# Altium PCB FRDM-Shield3.PcbDoc (part 1 of 2)
Units mil, origin at the board's own origin, x right, y up, seen from the top; angles counter-clockwise.
Board outline 3211.75 x 2684.86 mil, 2 copper layers (Top Layer, Bottom Layer), stack 15.3 mil thick; 43 components, 78 nets, 228 pads, 12 vias.
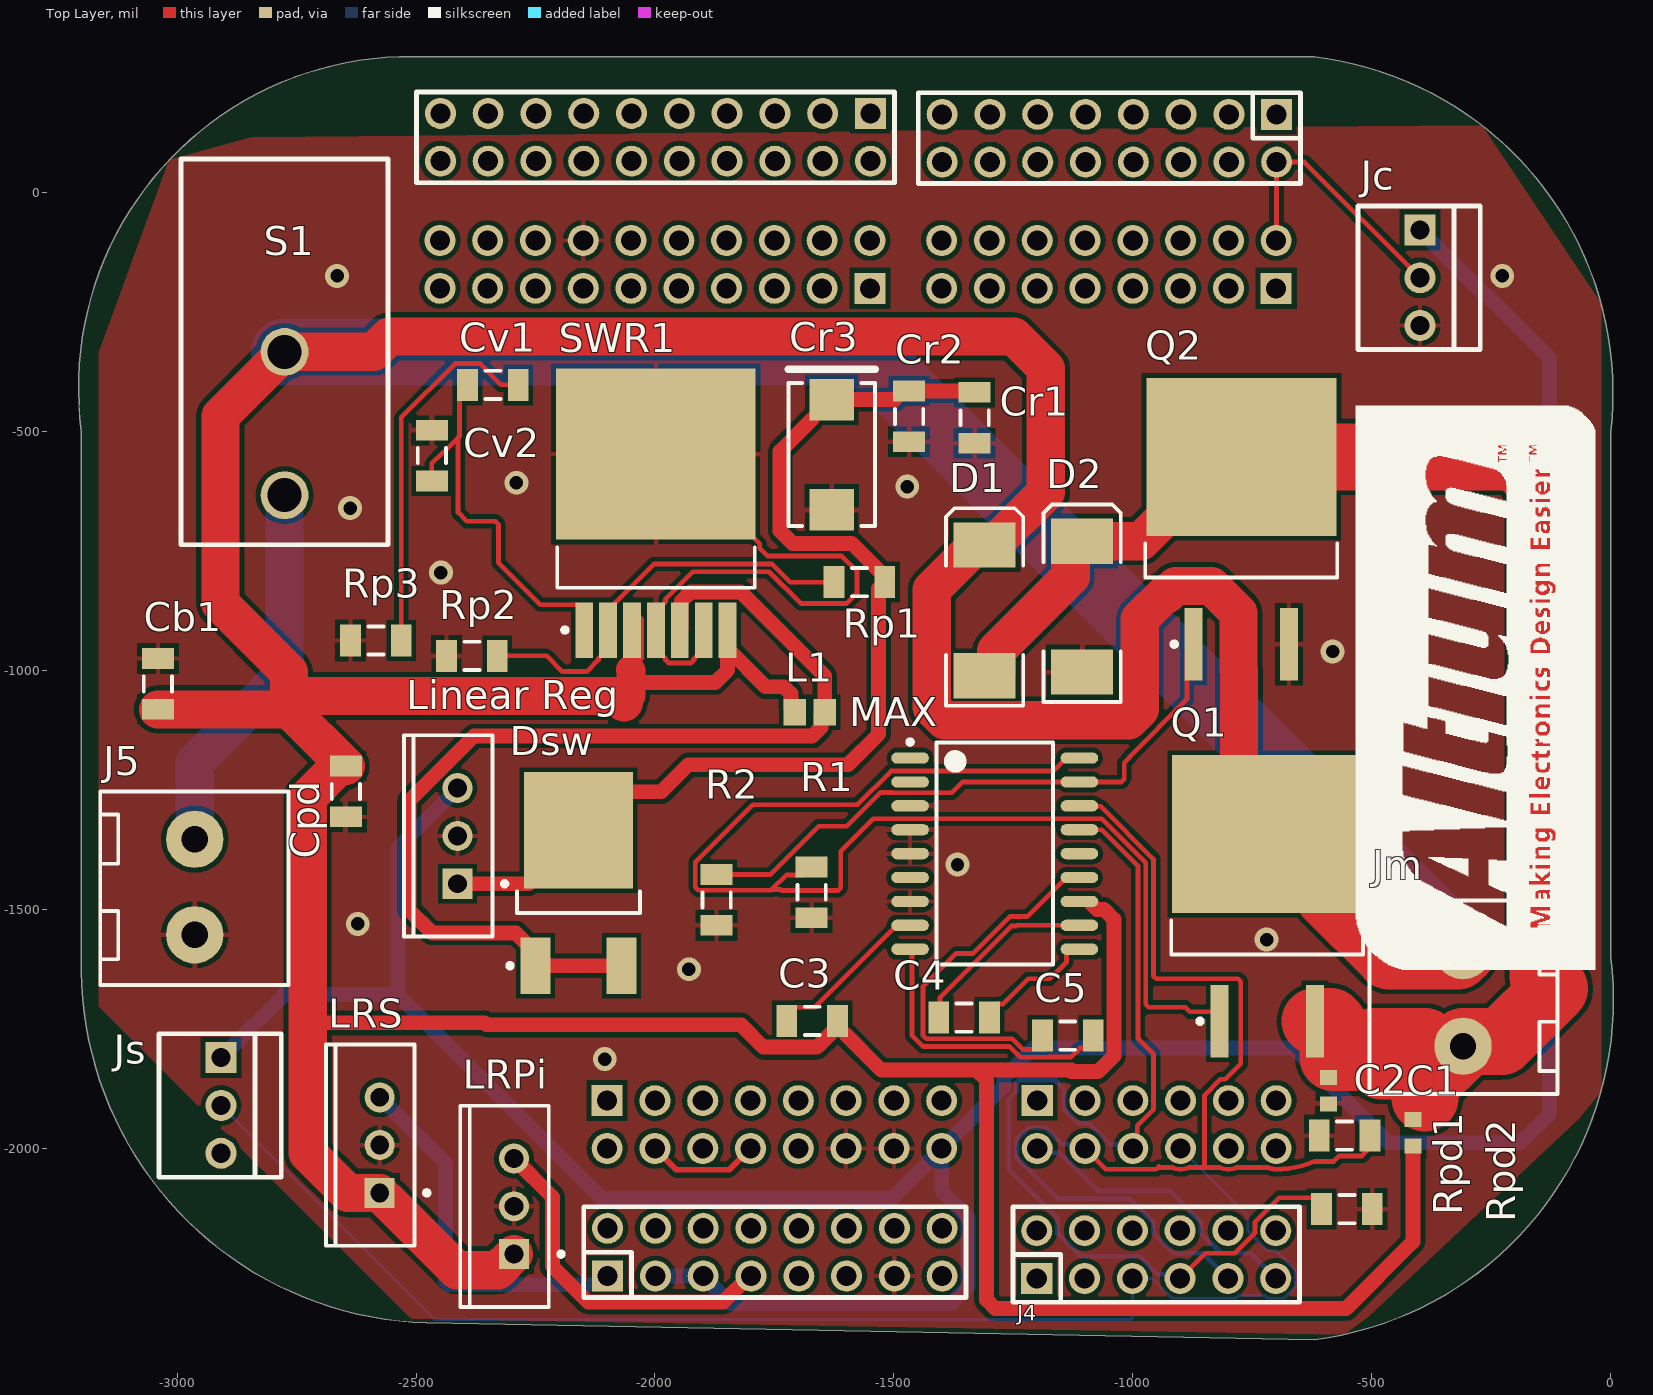
[diagram p0: Top Layer view]
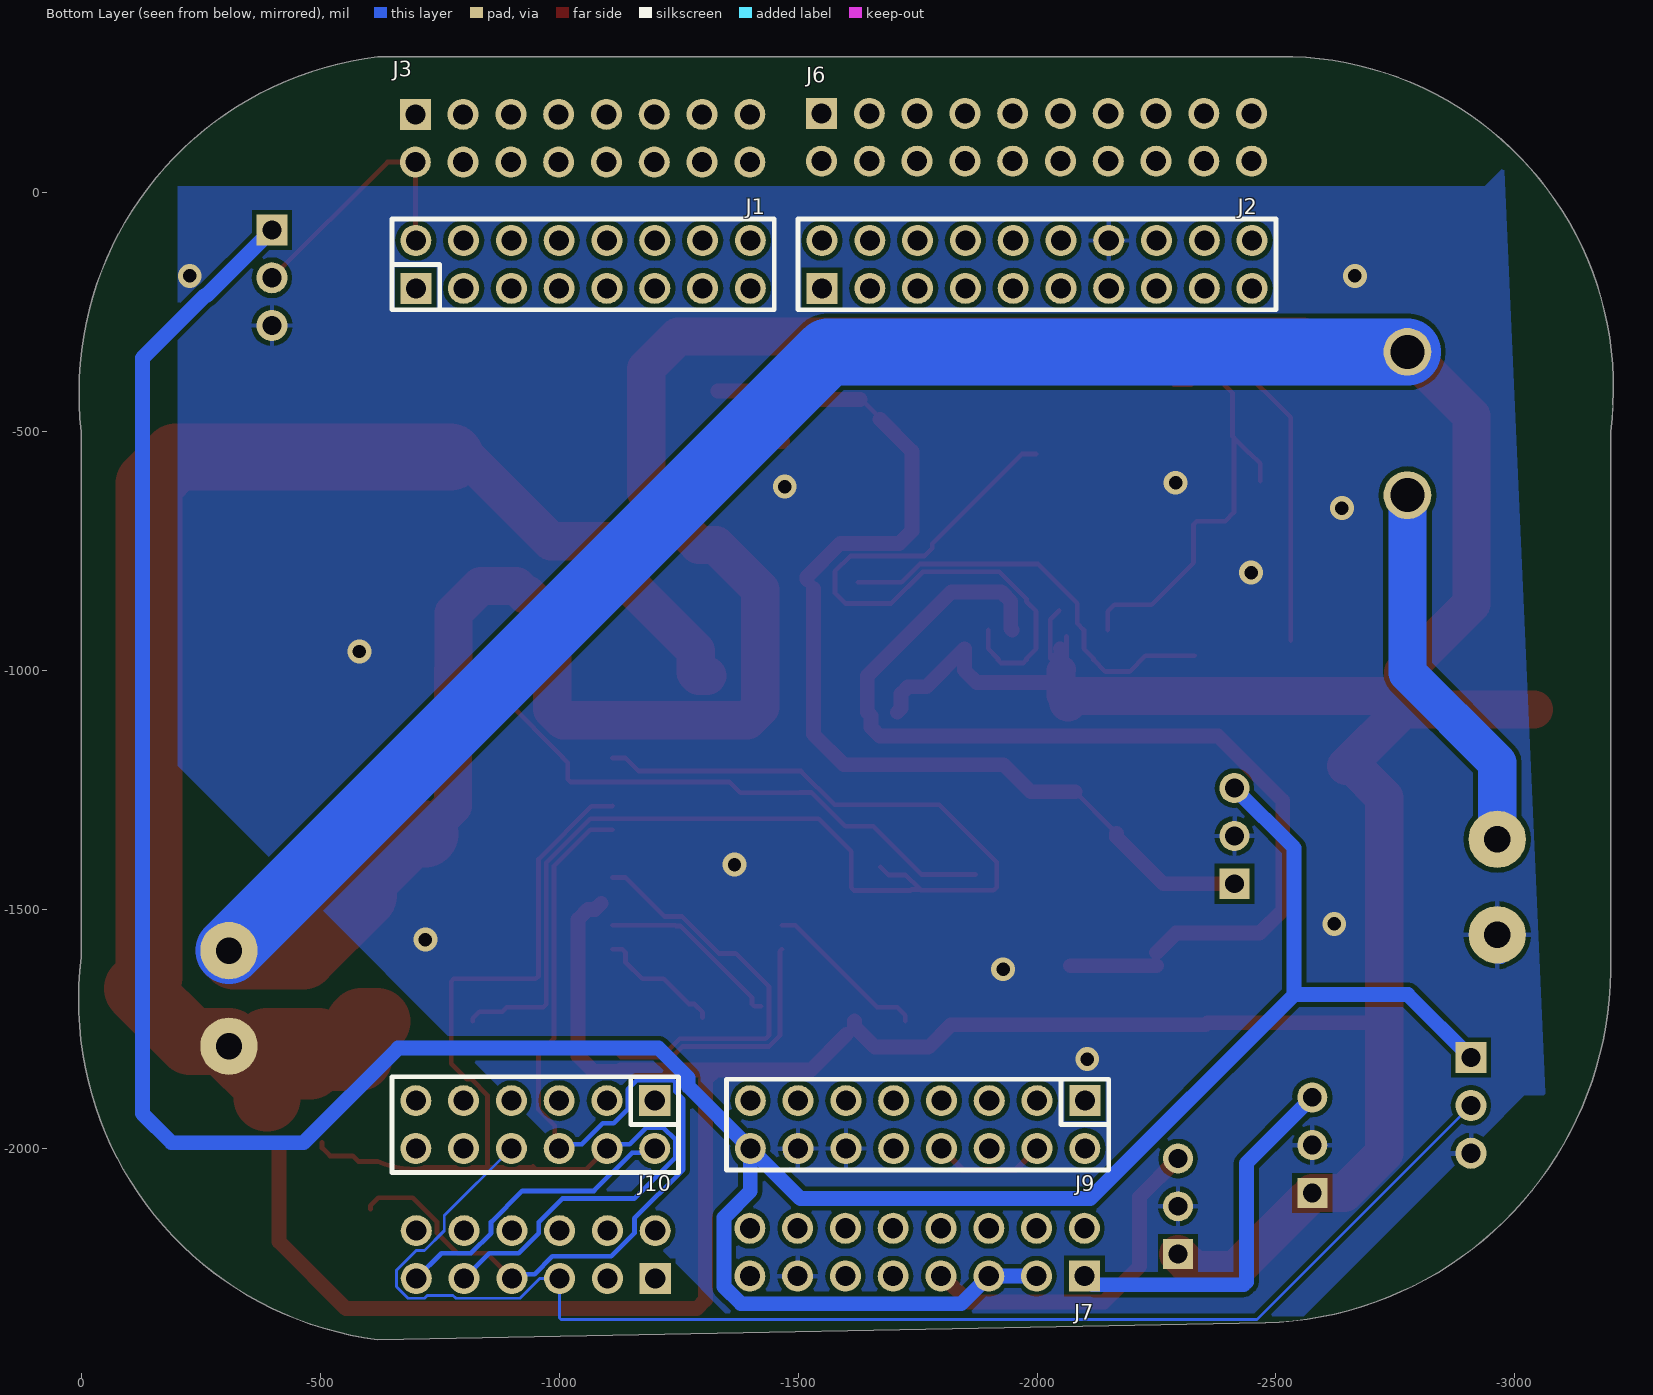
[diagram p1: Bottom Layer view, seen from below]
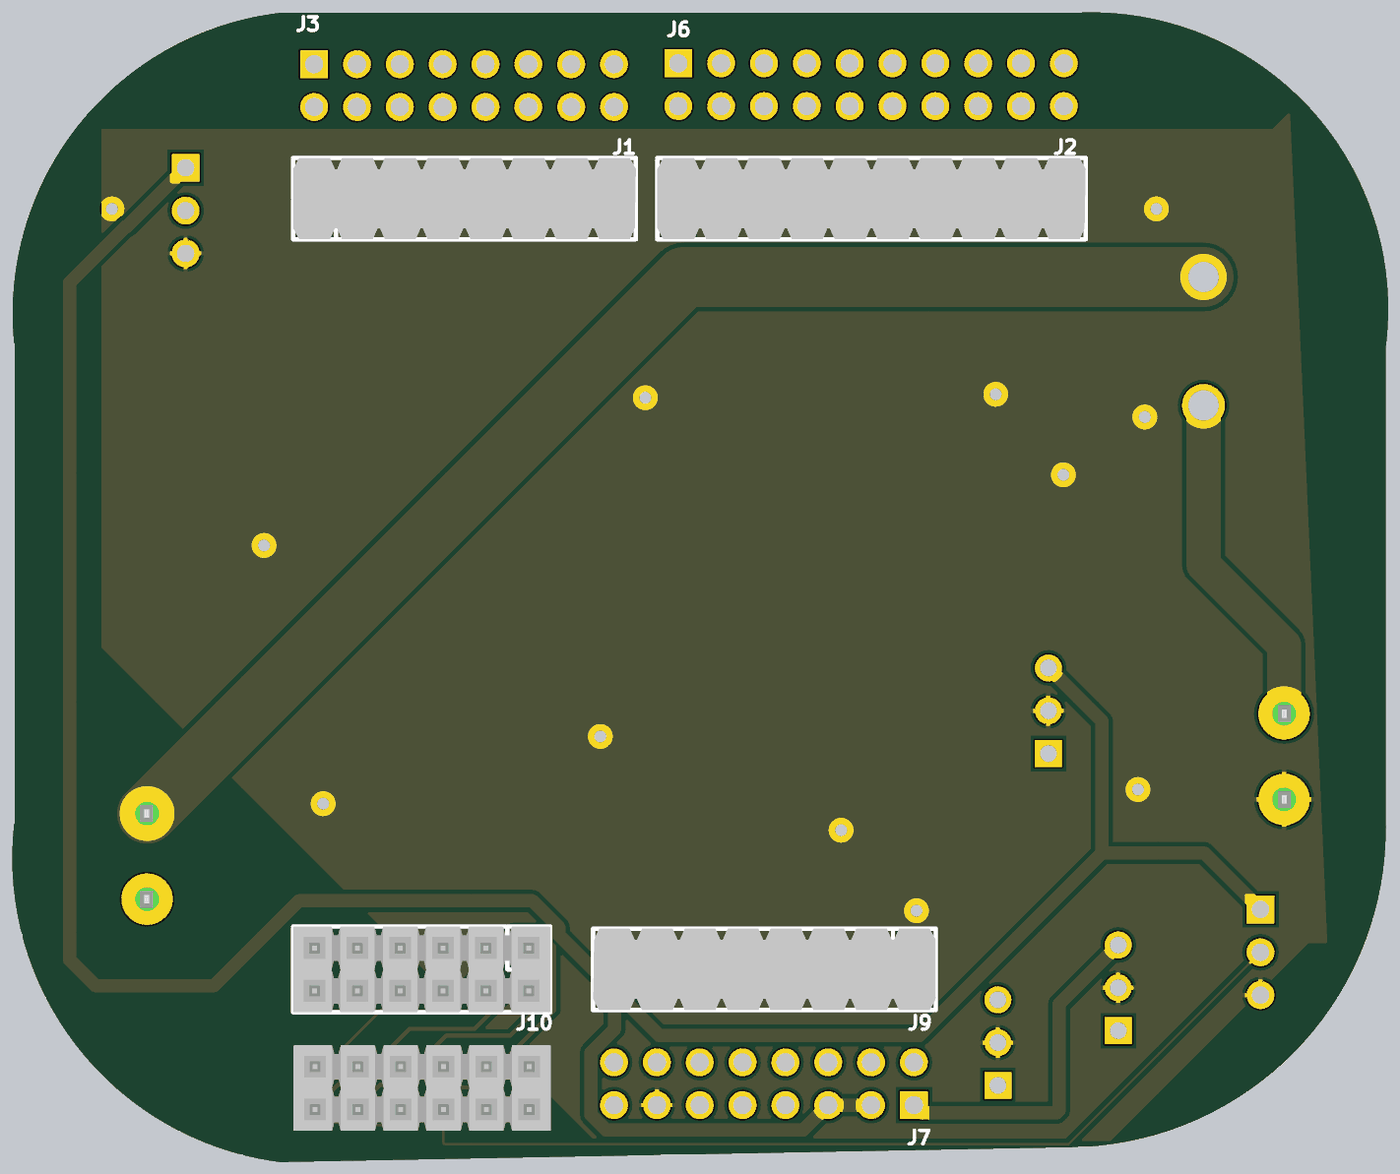
[diagram p2: 3D render of the assembled board from below, using the file's embedded part models]

## Layer stack, top to bottom
Top Solder: solder mask 0.4, Solder Resist, Dk 3.5
Top Layer: signal copper 1.4
Dielectric1: core 12.5, FR-4, Dk 4.8
Bottom Layer: signal copper 1.4
Bottom Solder: solder mask 0.4, Solder Resist, Dk 3.5

## Board outline
-3200,-1600 ccw(c-2456.51,-1621.51) -2478.02,-2365 -620.19,-2400 ccw(c-710.1,-1689.91) 0,-1600 0,-500 ccw(c-702.09,-418.09) -620.19,284 -989,284 -1736,284 -2478.02,284 ccw(c-2513.25,-407.99) -3200,-500

## Design rules (kind name [scope] priority, off if disabled: settings)
Clearance Polygon [(InNet('GND') AND InPoly)] p1: gap=10 ignorepadtopadclearanceinfootprint=FALSE except(0: Arc-Hole Track-Hole SMDPad-Hole THPad-Hole Via-Hole Fill-Hole Poly-Hole Region-Hole Text-Hole)
Clearance [All] p2: gap=6 ignorepadtopadclearanceinfootprint=FALSE
ComponentClearance [All] p1: gap=0 collisioncheckmode=3 verticalgap=0 showdistances=FALSE
Height [All] p1: minheight=0 maxheight=1500 prefheight=500
HoleSize [All] p1: absolutevalues=TRUE maxlimit=250 minlimit=15 maxpercent=80.000 minpercent=20.000
HoleToHoleClearance [All] p1: gap=2 allowstackedmicrovias=TRUE
MinimumAnnularRing [All] p1: minimumring=7
MinimumSolderMaskSliver [All] p1: minsoldermaskwidth=6
PlaneConnect [All] p1: planeconnectstyle=Direct reliefexpansion=20 reliefentries=4 reliefconductorwidth=10 reliefairgap=10
PolygonConnect PolygonConnect_1 [IsVia] p1: connectstyle=Direct reliefconductorwidth=10 reliefentries=4 polygonreliefangle="90 Angle" airgapwidth=10
PolygonConnect [All] p2: connectstyle=Relief reliefconductorwidth=10 reliefentries=4 polygonreliefangle="90 Angle" airgapwidth=10
RoutingVias [All] p1: holewidth=12 width=24 viastyle="Through Hole" minholewidth=12 minwidth=24 maxholewidth=50 maxwidth=100
ShortCircuit ShortCircuit_1 [HasFootprint('4-40 X 250') vs HasFootprint('4-40 X 250')] p1: allowed=TRUE
ShortCircuit [All] p2: allowed=FALSE
SilkToSilkClearance [All] p1: silktosilkclearance=0
SilkToSolderMaskClearance SilkscreenOverComponentPads [IsPad] p1: minsilkscreentomaskgap=0 clearancetoexposedcopper=TRUE
SolderMaskExpansion [All] p1: expansion=4 istentingtop=FALSE
Width [All] p1: maxlimit=300 minlimit=6 preferedwidth=6
21 further rules are at their usual default settings.

## Classes and differential pairs
component class PSU: Cb1 Cr1 Cr2 Cr3 Cv1 Cv2 Dsw L1 "Linear Reg" Rp1 Rp2 Rp3 SWR1
component class MotorController: C1 C2 C3 C4 C5 Cpd D1 D2 Jm MAX Q1 Q2 R1 R2 Rpd1 Rpd2
component class Connectors: D6 J1 J2 J3 J4 J5 J6 J7 J8 J9 J10 J12 Jc Js LRPi LRS R18 S1

## Components (designator, comment, footprint, x,y, rotation, side; value= is the part's Value field where it differs from the comment)
C1 "1608-1365-1-ND" 1608[0603] -414,-1967 r270 top value=100pF
C2 "1608-1365-1-ND" 1608[0603] -591,-1879 r90 top value=100pF
C3 "720-VJ0603V105ZXJCW1BCCT-ND" C1206 -1671,-1733 r0 top value=1uF
C4 "311-3320-1-ND" C1206 -1353,-1726 r0 top value=0.047uF
C5 "311-3320-1-ND" C1206 -1136,-1764 r0 top value=0.047uF
Cb1 "581-F931C226MAAAJ6" C1206 -3040,-1028 r270 top value=22uF
Cpd "587-6508-1-ND" C1206 -2647,-1253 r90 top value=0.1uF
Cr1 "581-F931C226MAAAJ6" C1206 -1331,-471 r90 top value=22uF
Cr2 "581-F931C226MAAAJ6" C1206 -1468,-468 r90 top value=22uF
Cr3 "399-3770-1-ND" KEMT-T491-D_L -1630,-548 r270 top
Cv1 "311-3320-1-ND" C1206 -2339,-402 r0 top value=0.047uF
Cv2 "311-3320-1-ND" C1206 -2467,-550 r90 top value=0.047uF
D1 "65W8781" SMC -1310,-874 r90 top
D2 "65W8781" SMC -1106,-866 r90 top
Dsw "MBRD835LT4G" ONSC-DPAK-3-369C-01_V -2160,-1444.24 r90 top
J1 "67996-416HLF" 67996-416HLF#1 -1050,-150 r180 bottom locked
J2 "67996-420HLF" 67996-420HLF#1 -2000,-150 r180 bottom locked
J3 "67996-416HLF" 67996-416HLF#2 -1050,116 r0 bottom
J4 "67996-412HLF" 67996-412HLF#1 -951,-2227 r180 top locked
J5 "282857-2" 282857-2 -2963,-1353 r180 top
J6 "67996-420HLF" 67996-420HLF#2 -1999,116 r0 bottom
J7 "67996-416HLF" 67996-416HLF#2 -1748,-2219 r180 bottom locked
J9 "67996-416HLF" 67996-416HLF#1 -1750,-1950 r0 bottom locked
J10 "67996-412HLF" 67996-412HLF#2 -950,-1950 r0 bottom locked
Jc "571-6404543" 6404543 -399,-178 r0 top
Jm "282857-2" 282857-2 -309,-1786 r0 top
Js "571-6404543" 6404543 -2908,-1910 r0 top
L1 "732-1025-1-ND" 2029 -1676,-1087 r0 top value=10uH
"Linear Reg" "LM2940CT-5.0/NOPB-ND" NDE0003A -2413,-1346 r90 top
LRPi "LM2940CT-5.0/NOPB-ND" NDE0003A -2295,-2121 r90 top
LRS "LM2940CT-5.0/NOPB-ND" NDE0003A -2576,-1993 r90 top
MAX "MAX620CWN+" SOIC-SO18_L -1289,-1383 r0 top
Q1 "726-IPB50R140CP" INF-PG-TO263-3-2_N -719,-1493.57 r90 top
Q2 "726-IPB50R140CP" INF-PG-TO263-3-2_N -773,-704.57 r90 top
R1 "311-10KGRCT-ND" C1206 -1672,-1464 r90 top value=10K
R2 "311-10KGRCT-ND" C1206 -1871,-1480 r90 top value=10K
Rp1 "541-53.6FCT-ND" C1206 -1572,-815 r0 top value=53.6K
Rp2 "CR1206-FX-6191ELFCT-ND" C1206 -2383,-969 r0 top value=6.19K
Rp3 "CR1206-FX-2001ELFCT-ND" C1206 -2584,-937 r0 top value=2K
Rpd1 "603-RT1206FRD0710KL" C1206 -557,-1973 r180 top value=1K
Rpd2 "603-RT1206FRD0710KL" C1206 -552,-2127 r180 top value=1K
S1 "SW-PB" SPST -2775,-333 r90 top
SWR1 "LT1370CR#TRPBFCT-ND" LT-R-7_L -1998,-671 r90 top

## Footprints (in the part's own frame and the unit in brackets; to place one, negate y for a bottom-side part, rotate by r counter-clockwise, add the part's x,y. Pads: shape width x height; smd on the part's side, far side on the other; paste and mask are expansions set on the pad)
1608[0603] [mm] "Chip Capacitor, Body 1.6x0.8mm, IPC High Density"
  rect 0.8x0.9 smd: 1(-0.7,0) 2(0.7,0)
  body extent -0.87,-0.48 0.87,0.48, height 1.3
2029 [mm] "Chip Inductor, Body 2.0x1.2mm, IPC High Density"
  rect 1.2x1.4 smd: 1(-0.8,0) 2(0.8,0)
  body extent -1.1,-0.7 1.1,0.7, height 0.55
67996-412HLF#1 [mil] "CONN HEADER 12POS .100 STR TIN"
  rect 65x65 hole 42: 1(250,45)
  round 65 hole 42: 2(250,-55) 3(150,45) 4(150,-55) 5(50,45) 6(50,-55) 7(-50,45) 8(-50,-55) 9(-150,45) 10(-150,-55) 11(-250,45) 12(-250,-55)
  silkscreen extent -300,-105 300,95, body extent -300,-100 300,100, height 80
67996-412HLF#2 [mil] "CONN HEADER 12POS .100 STR TIN"
  rect 65x65 hole 42: 1(-250,-50)
  round 65 hole 42: 2(-250,50) 3(-150,-50) 4(-150,50) 5(-50,-50) 6(-50,50) 7(50,-50) 8(50,50) 9(150,-50) 10(150,50) 11(250,-50) 12(250,50)
  silkscreen extent -300,-100 300,100, body extent -300,-100 300,100, height 331
67996-416HLF#1 [mil] "CONN HEADER 16POS .100 STR TIN"
  rect 65x65 hole 42: 1(-350,-50)
  round 65 hole 42: 2(-350,50) 3(-250,-50) 4(-250,50) 5(-150,-50) 6(-150,50) 7(-50,-50) 8(-50,50) 9(50,-50) 10(50,50) 11(150,-50) 12(150,50) 13(250,-50) 14(250,50) 15(350,-50) 16(350,50)
  silkscreen extent -400,-95 400,95, body extent -400,-95 400,95, height 305
67996-416HLF#2 [mil] "CONN HEADER 16POS .100 STR TIN"
  rect 65x65 hole 42: 1(351,-48)
  round 65 hole 42: 2(351,52) 3(251,-48) 4(251,52) 5(151,-48) 6(151,52) 7(51,-48) 8(51,52) 9(-49,-48) 10(-49,52) 11(-149,-48) 12(-149,52) 13(-249,-48) 14(-249,52) 15(-349,-48) 16(-349,52)
  body extent -399,-93 401,97, height 305
67996-420HLF#1 [mil] "CONN HEADER 20POS .100 STR TIN"
  rect 65x65 hole 42: 1(-450,-50)
  round 65 hole 42: 2(-450,50) 3(-350,-50) 4(-350,50) 5(-250,-50) 6(-250,50) 7(-150,-50) 8(-150,50) 9(-50,-50) 10(-50,50) 11(50,-50) 12(50,50) 13(150,-50) 14(150,50) 15(250,-50) 16(250,50) 17(350,-50) 18(350,50) 19(450,-50) 20(450,50)
  silkscreen extent -500,-95 500,95, body extent -500,-95 500,95, height 305
67996-420HLF#2 [mil] "CONN 20 PIN 0.100 IN"
  rect 65x65 hole 42: 1(450,-50)
  round 65 hole 42: 2(450,50) 3(350,-50) 4(350,50) 5(250,-50) 6(250,50) 7(150,-50) 8(150,50) 9(50,-50) 10(50,50) 11(-50,-50) 12(-50,50) 13(-150,-50) 14(-150,50) 15(-250,-50) 16(-250,50) 17(-350,-50) 18(-350,50) 19(-450,-50) 20(-450,50)
  body extent -500,-95 500,95, height 305
282857-2 [mil] "TE CONNECTIVITY / BUCHANAN  282857-2  Wire-To-Board Terminal Block, 2, 300 V, 24 A, 30 AWG, 12 AWG, 3 mm²"
  round 120 hole 55: 1(0,0) 2(0,200)
  silkscreen extent -196,-100 198,305, body extent -196,-100 198,320, height 752
6404543 [mil] "Headers & Wire Housings POLARIZED HEADER 3P Straight Post tin"
  rect 65x65 hole 40: 1(0,100)
  round 65 hole 40: 2(0,0) 3(0,-100)
  silkscreen extent -130,-150 126,150, body extent -130,-150 125,150, height 395
C1206 [mm] "Chip Capacitor, Body 3.2x1.6mm, IPC High Density"
  rect 1.1x1.7 smd: 1(-1.35,0) 2(1.35,0)
  silkscreen extent -0.4,-0.75 0.4,0.75, body extent -1.7,-0.9 1.7,0.9, height 1.3
INF-PG-TO263-3-2_N [mm] "DPAK, 3-Leads, Body 10x9.25mm, Pitch 2.54mm, IPC Medium Density"
  rect 3.85x0.95 smd: 1(-6.1,2.54) 3(-6.1,-2.54)
  rect 8.4x10.1 smd: 2(3.85,0)
  silkscreen extent -6.22,-5.1 -0.75,5.1, body extent -2.55,-5.1 6.9,5.1, height 4.4
KEMT-T491-D_L [mm] "Molded Capacitor, 2-Leads, Body 7.60x4.60mm, IPC High Density"
  rect 2.2x2.35 smd: 1(-2.925,0) 2(2.925,0)
  silkscreen extent -4.52,-2.3 3.8,2.3, body extent -3.8,-2.3 3.8,2.3, height 3.1
LT-R-7_L [mm] "DPAK, 7-Leads, Body 10.224x8.89mm, Pitch 1.27mm, IPC High Density"
  rect 2.95x0.95 smd: 1(-6.2,3.81) 2(-6.2,2.54) 3(-6.2,1.27) 4(-6.2,0) 5(-6.2,-1.27) 6(-6.2,-2.54) 7(-6.2,-3.81)
  rect 9.1x10.6 smd: 8(3.15,0)
  silkscreen extent -6.32,-5.25 -1.8,5.25, body extent -3.95,-5.28 5.45,5.28, height 4.58
NDE0003A [mm] "FM, 3-Leads, Body 10.7x4.7mm, Pitch 2.54mm"
  rect 1.6x1.6 hole 1: 1(-2.54,0)
  round 1.6 hole 1: 2(0,0) 3(2.54,0)
  silkscreen extent -5.35,-2.63 5.35,2.85, body extent -5.4,-1.9 5.4,2.9, height 19.4
ONSC-DPAK-3-369C-01_V [mm] "DPAK, 3-Leads, Body 6.54x6.095mm, Pitch 2.29mm"
  rect 3x1.6 smd: 1(-4.4,2.29) 3(-4.4,-2.29)
  rect 6.2x5.8 smd: 4(2.8,0)
  silkscreen extent -4.52,-3.27 -0.45,3.76, body extent -1.6,-3.27 4.49,3.27, height 2.38
SMC [mm] "DO-214-AB/SMC; 2 C-Bend Leads; Body 7.9 x 5.9 mm, inc. leads (LxW)"
  rect 2.4x3.3 smd: 1(-3.475,0) 2(3.475,0)
  silkscreen extent -5.07,-2.05 5.43,2.05
SOIC-SO18_L [mm] "SOIC, 18-Leads, Body 11.6x7.5mm, Pitch 1.27mm, IPC High Density"
  oval 2x0.6 smd: 1(-4.5,5.08) 2(-4.5,3.81) 3(-4.5,2.54) 4(-4.5,1.27) 5(-4.5,0) 6(-4.5,-1.27) 7(-4.5,-2.54) 8(-4.5,-3.81) 9(-4.5,-5.08) 10(4.5,-5.08) 11(4.5,-3.81) 12(4.5,-2.54) 13(4.5,-1.27) 14(4.5,0) 15(4.5,1.27) 16(4.5,2.54) 17(4.5,3.81) 18(4.5,5.08)
  silkscreen extent -4.62,-5.9 3.1,6.05, body extent -3.8,-5.87 3.8,5.87, height 2.65
SPST [mil]
  round 100 hole 71: 1(-300,0) 2(0,0)
  silkscreen extent -404,-217 404,217

## Part data
C1 C2: library part Cap, "Multilayer Ceramic Capacitors MLCC - SMD/SMT 0603 100pF 50V 5% Tol C0G, Digi-key", Capacitance=50pF, Case Code (Imperial)=0603, Case Code (Metric)=1608, Dielectric=C0G, Manufacturer="Knowles Syfer", Manufacturer Part Number=0603Y0500101JCT, Max Operating Temperature=125°C, Min Operating Temperature=-55°C, Package Quantity=4000, Tolerance=5%, Voltage Rating=50V, Case/Package=0603, Category="Ceramic Capacitors", ComponentLink1Description=https://datasheet.ciiva.com/5428/tandardmlccdatasheet-369797-5428107.pdf?src-supplier=Mouser, ComponentLink1URL=https://datasheet.ciiva.com/5428/tandardmlccdatasheet-369797-5428107.pdf?src-supplier=Mouser, Composition=Ceramic, Depth=0.8mm, Dissipation Factor=0.1%, LatestRevisionDate=17-Jul-2002, LatestRevisionNote="Re-released for DXP Platform.", Length=1.6mm, PackageDescription="Radial Cap, Thru-Hole; 2 Leads; 0.3 in Pin Spacing", PackageReference=RAD-0.3, Packaging="Tape and Reel", Pricing 2="1=0.59000, 10=0.42000, 100=0.27650, 500=0.20480, 1000=0.17407 (USD)", Published=8-Jun-2000, Publisher="Altium Limited", RoHS=Yes, Stock 2=32028, Supplier 1=Digi-Key, Supplier 2=Digi-Key, Supplier Part Number 2=1608-1365-1-ND, Termination=SMD/SMT, Voltage Rating (DC)=50V
C3: library part Cap, "Cap Ceramic 1uF 16V Y5V -20% to 80% SMD 0603 85C Paper T/R, Digi-key", Capacitance=1uF, Case/Package=0603, Dielectric=Y5V, Dielectric Material=Tantalum, Manufacturer="Vishay Vitramon", Manufacturer Part Number=VJ0603V105ZXJCW1BC, Max Operating Temperature=85°C, Min Operating Temperature=-25°C, Tolerance=80%, Voltage Rating (DC)=16V, Category="Ceramic Capacitors", ComponentLink1Description=https://datasheet.ciiva.com/11489/vjw1bcbascomseries-11489855.pdf?src-supplier=Avnet, ComponentLink1URL=https://datasheet.ciiva.com/11489/vjw1bcbascomseries-11489855.pdf?src-supplier=Avnet, Depth=0.8mm, LatestRevisionDate=17-Jul-2002, LatestRevisionNote="Re-released for DXP Platform.", Lead Free="Lead Free", Length=1.6mm, Mount="Surface Mount", PackageDescription="Radial Cap, Thru-Hole; 2 Leads; 0.3 in Pin Spacing", PackageReference=RAD-0.3, Pricing 1="1=0.29000, 10=0.19600, 100=0.09910, 500=0.06784, 1000=0.06001 (USD)", Published=8-Jun-2000, Publisher="Altium Limited", RoHS=Yes, Stock 1=4000, Supplier 1=Digi-Key, Supplier Part Number 1=720-VJ0603V105ZXJCW1BCCT-ND
C4 C5 Cv1 Cv2: library part Cap, "CAP CER 0.47UF 4V X5R 0201, Digi-key", Capacitance=470nF, Case/Package=0201, Manufacturer=Yageo, Manufacturer Part Number=CC0201MRX5R4BB474, Max Operating Temperature=85°C, Min Operating Temperature=-55°C, Tolerance=20%, Voltage Rating=4V, Category="Ceramic Capacitors", ComponentLink1Description=http://www.yageo.com/documents/recent/UPY-GPHC_X5R_4V-to-50V_23.pdf?src-supplier=Digi-Key, ComponentLink1URL=http://www.yageo.com/documents/recent/UPY-GPHC_X5R_4V-to-50V_23.pdf?src-supplier=Digi-Key, ComponentLink2Description=http://www.yageo.com/documents/recent/UPY-GPHC_X5R_4V-to-50V_25.pdf?src-supplier=Digi-Key, ComponentLink2URL=http://www.yageo.com/documents/recent/UPY-GPHC_X5R_4V-to-50V_25.pdf?src-supplier=Digi-Key, LatestRevisionDate=17-Jul-2002, LatestRevisionNote="Re-released for DXP Platform.", Length=0.024inch, Mount="Surface Mount", PackageDescription="Radial Cap, Thru-Hole; 2 Leads; 0.3 in Pin Spacing", PackageReference=RAD-0.3, Packaging="Tape and Reel", Pricing 1="1=0.10000, 10=0.07100, 100=0.03150, 500=0.02252, 1000=0.01770, 2500=0.01609, 5000=0.01480 (USD)", Published=8-Jun-2000, Publisher="Altium Limited", RoHS=Yes, Stock 1=31395, Supplier 1=Digi-Key, Supplier Part Number 1=311-3320-1-ND, Thickness=0.013inch, Width=0.012inch
Cb1 Cr1 Cr2: library part Cap, "Cap Tant Solid 22uF 16V A CASE 20% (3.2 X 1.6 X 1.6mm) Inward L SMD 3216-18 3 Ohm 125C Automotive T/R, Mouser", Manufacturer="Kyocera AVX", Manufacturer Part Number=F931C226MAAAJ6, LatestRevisionDate=17-Jul-2002, LatestRevisionNote="Re-released for DXP Platform.", PackageDescription="Radial Cap, Thru-Hole; 2 Leads; 0.3 in Pin Spacing", PackageReference=RAD-0.3, Pricing 1="1=0.64000, 10=0.45200, 100=0.28600, 500=0.22000, 1000=0.18700, 2000=0.14300 (USD)", Published=8-Jun-2000, Publisher="Altium Limited", RoHS=No, Stock 1=5204, Supplier 1=Mouser, Supplier Part Number 1=581-F931C226MAAAJ6
Cpd: library part Cap, "Multilayer Ceramic Capacitor 0.1uF 50V 10% 1206 Emboss T/R, Digikey", Manufacturer="Taiyo Yuden", Manufacturer Part Number=UMF316B7104KLHT, LatestRevisionDate=17-Jul-2002, LatestRevisionNote="Re-released for DXP Platform.", PackageDescription="Radial Cap, Thru-Hole; 2 Leads; 0.3 in Pin Spacing", PackageReference=RAD-0.3, Pricing 1="1=0.48000, 10=0.33200, 100=0.19920, 500=0.14942, 1000=0.12618 (USD)", Published=8-Jun-2000, Publisher="Altium Limited", RoHS=No, Stock 1=3880, Supplier 1=Digi-Key, Supplier Part Number 1=587-6508-1-ND
Cr3: library part CMP-2000-07541-1, "Tantalum Surface Mount Capacitor, 100 uF, +/- 10%, 16 V, -55 to 125 degC, 2917 (7343 Metric), RoHS, Tape and Reel, Digi-key", Capacitance=100uF, Case Code (Imperial)=2917, Case Code (Metric)=7343, Case/Package=Molded, Dielectric Material=Tantalum, ESR (Equivalent Series Resistance)=700mOhm, Leakage Current=16uA, Manufacturer=Kemet, Manufacturer Part Number=T491D107K016AT, Max Operating Temperature=125degC, Min Operating Temperature=-55degC, Package Description="2-Pin Surface Mount Device, Body 7.3 x 4.3 mm", Package Quantity=1, Package Reference=T491-D, Ripple Current=463mA, Tolerance=10%, Voltage=16V, Case\/Package=Molded, Category="Tantalum Capacitors", ComponentLink1Description=https://datasheet.ciiva.com/20171/458379-da-en-01-20171921.pdf?src-supplier=Rapid+Electronics, ComponentLink1URL=https://datasheet.ciiva.com/20171/458379-da-en-01-20171921.pdf?src-supplier=Rapid+Electronics, ComponentLink2Description=https://datasheet.ciiva.com/27052/1574225-27052588.pdf?src-supplier=Jameco, ComponentLink2URL=https://datasheet.ciiva.com/27052/1574225-27052588.pdf?src-supplier=Jameco, ComponentLink3Description=https://datasheet.ciiva.com/5934/1732757-5934631.pdf?src-supplier=Farnell, ComponentLink3URL=https://datasheet.ciiva.com/5934/1732757-5934631.pdf?src-supplier=Farnell, ComponentLink4Description=https://datasheet.ciiva.com/26341/458379-da-01-en-kondensator-100uf-7343-10pr-16v-85c-26341618.pdf?src-supplier=Conrad, ComponentLink4URL=https://datasheet.ciiva.com/26341/458379-da-01-en-kondensator-100uf-7343-10pr-16v-85c-26341618.pdf?src-supplier=Conrad, ComponentLink5Description=https://datasheet.ciiva.com/260/kem-t2005-t491-260262.pdf?src-supplier=Digi-Key, ComponentLink5URL=https://datasheet.ciiva.com/260/kem-t2005-t491-260262.pdf?src-supplier=Digi-Key, ComponentLink6Description=https://datasheet.ciiva.com/260/kem-t2005-t491-260263.pdf?src-supplier=Digi-Key, ComponentLink6URL=https://datasheet.ciiva.com/260/kem-t2005-t491-260263.pdf?src-supplier=Digi-Key, ComponentLink7Description=https://datasheet.ciiva.com/41657/1854511-41657335.pdf?src-supplier=Farnell, ComponentLink7URL=https://datasheet.ciiva.com/41657/1854511-41657335.pdf?src-supplier=Farnell, ComponentLink8Description=https://datasheet.ciiva.com/260/kem-t2005-t491-260264.pdf?src-supplier=Digi-Key, ComponentLink8URL=https://datasheet.ciiva.com/260/kem-t2005-t491-260264.pdf?src-supplier=Digi-Key, ComponentLink9Description=https://datasheet.ciiva.com/14595/70095774-14595116.pdf?src-supplier=Allied+Electronics, ComponentLink9URL=https://datasheet.ciiva.com/14595/70095774-14595116.pdf?src-supplier=Allied+Electronics, ComponentLink10Description=https://datasheet.ciiva.com/7696/1854511-7696350.pdf?src-supplier=Element14, ComponentLink10URL=https://datasheet.ciiva.com/7696/1854511-7696350.pdf?src-supplier=Element14, ComponentLink11Description=https://datasheet.ciiva.com/14588/70095774-14588350.pdf?src-supplier=Allied+Electronics, ComponentLink11URL=https://datasheet.ciiva.com/14588/70095774-14588350.pdf?src-supplier=Allied+Electronics, ComponentLink12Description=https://datasheet.ciiva.com/7696/1854511-7696351.pdf?src-supplier=Element14, ComponentLink12URL=https://datasheet.ciiva.com/7696/1854511-7696351.pdf?src-supplier=Element14, Datasheet URL=http://www.kemet.com/Lists/ProductCatalog/Attachments/254/KEM_T2005_T491.pdf, Datasheet Version=07/2017, Depth=4.3mm, Dissipation Factor=8%, Features="General Purpose", Height=2.8mm, Height - Seated (Max)=0.122inch, Lead Free=LeadFree, Lead Pitch=3.6mm, Length=7.3mm, Life (Hours)=2000Hour, Manufacturer URL=http://www.kemet.com/, Mount=PCB, Mounting Technology=SurfaceMount, Packaging=TapeandReel, Polarity=Polar, Pricing 1="1=1.30000, 10=1.02600, 100=0.76930 (USD)", Radiation Hardening=No, REACH SVHC=NoSVHC, RoHS=Yes, RoHSCompliant=true, Stock 1=119781, Supplier 1=Digi-Key, Supplier Part Number 1=399-3770-1-ND, Termination=SMD/SMT, Voltage Rating=16V, Voltage Rating (DC)=16V, Weight=0.023634oz, Width=4.3mm
D1 D2: library part Diode, "MULTICOMP - 1N4007 - DIODE, STANDARD, 1A, 1000V,DO-41, Newark", Forward Current=1A, Forward Voltage=1.1V, Manufacturer=Multicomp, Manufacturer Part Number=1N4007, Max Forward Surge Current (Ifsm)=30A, Max Operating Temperature=150°C, Max Repetitive Reverse Voltage (Vrrm)=1kV, Min Operating Temperature=-65°C, Category="Rectifier Diodes", Code_JEDEC=DO-214-AB, ComponentLink1Description=https://datasheet.ciiva.com/1176/58590-1176850.pdf?src-supplier=Element14, ComponentLink1URL=https://datasheet.ciiva.com/1176/58590-1176850.pdf?src-supplier=Element14, ComponentLink2Description=https://datasheet.ciiva.com/1176/41320-1176847.pdf?src-supplier=Element14, ComponentLink2URL=https://datasheet.ciiva.com/1176/41320-1176847.pdf?src-supplier=Element14, ComponentLink3Description=https://datasheet.ciiva.com/1239/1505911-1239362.pdf?src-supplier=Newark, ComponentLink3URL=https://datasheet.ciiva.com/1239/1505911-1239362.pdf?src-supplier=Newark, Element Configuration=Single, LatestRevisionDate=17-Jul-2002, LatestRevisionNote="Re-released for DXP Platform.", Number of Pins=2, PackageDescription="DO-214-AB/SMC; 2 C-Bend Leads; Body 7.9 x 5.9 mm, inc. leads (LxW)", PackageReference=SMC, PackageVersion=Sep-1996, Pricing 2="1=0.02200, 5000=0.02200, 10000=0.02000, 15000=0.01700, 25000=0.01400, 50000=0.01200 (USD)", Published=8-Jun-2000, Publisher="Altium Limited", REACH SVHC="No SVHC", RoHS=Yes, Stock 2=270000, Supplier 1=Newark, Supplier 2=Newark, Supplier Part Number 2=65W8781
Dsw: library part CMP-1055-00173-1, "SWITCHMODE(TM) Power Rectifier, 3-Pin DPAK, Pb-Free, Tape and Reel, Digi-key", Manufacturer="On Semiconductor", Supplier Part Number 1=MBRD835LT4GOSCT-ND, ComponentLink1Description="Manufacturer URL", ComponentLink1URL=http://www.onsemi.com/, ComponentLink2Description=Datasheet, ComponentLink2URL=http://www.onsemi.cn/pub_link/Collateral/MBRD835L-D.PDF, ComponentLink3Description="Package Specification", ComponentLink3URL=http://www.onsemi.cn/pub_link/Collateral/369C.PDF, Configuration=Single, DatasheetVersion="Rev. 11", IFSM Max (A)=75, Mounting Technology="Surface Mount", PackageDescription="3-Pin Flange Mount, Body 6.54 x 6.095 mm, Pitch 2.29 mm", PackageReference=DPAK-3-369C-01, PackageVersion="Rev. E, 02/2014", Packing="Tape and Reel", PartNumber=MBRD835LT4G, RoHS=TRUE, Supplier 1=Digi-Key
J1 J9: "CONN HEADER 16POS .100 STR TIN", Color=Black, Manufacturer=FCI, Supplier Part Number 1=609-3220-ND, Category="Connectors, Interconnects", ComponentLink1Description=http://portal.fciconnect.com/Comergent//fci/drawing/67996.pdf, ComponentLink1URL=http://portal.fciconnect.com/Comergent//fci/drawing/67996.pdf, Connector Type="Header, Unshrouded", Contact Finish=Tin, Contact Finish Thickness="100µin (2.54µm)", Contact Mating Length="0.230\" (5.84mm)", Contact Type="Male Pin", Fastening Type=-, Features=-, Manufacturer Part Number=67996-416HLF, Mounting Type="Through Hole", Number of Positions=16, Number of Positions Loaded=All, Number of Rows=2, Packaging=Bulk, Pitch="0.100\" (2.54mm)", Pricing 1="1=0.56, 10=0.521, 25=0.4684, 50=0.4164, 100=0.3991, 250=0.36436, 500=0.347, 1000=0.28628, 2500=0.26025 (USD)", RoHS="RoHS Compliant", Row Spacing="0.100\" (2.54mm)", Stock 1=1589, Supplier 1=Digi-Key, Termination=Solder
J2: "CONN HEADER 20POS .100 STR TIN", Color=Black, Manufacturer=FCI, Supplier Part Number 1=609-3221-ND, Category="Connectors, Interconnects", ComponentLink1Description=http://portal.fciconnect.com/Comergent//fci/drawing/67996.pdf, ComponentLink1URL=http://portal.fciconnect.com/Comergent//fci/drawing/67996.pdf, Connector Type="Header, Unshrouded", Contact Finish=Tin, Contact Finish Thickness="100µin (2.54µm)", Contact Mating Length="0.230\" (5.84mm)", Contact Type="Male Pin", Fastening Type=-, Features=-, Manufacturer Part Number=67996-420HLF, Mounting Type="Through Hole", Number of Positions=20, Number of Positions Loaded=All, Number of Rows=2, Packaging=Bulk, Pitch="0.100\" (2.54mm)", Pricing 1="1=0.66, 10=0.619, 25=0.5572, 50=0.4952, 100=0.4745, 250=0.43324, 500=0.4126, 1000=0.3404, 2500=0.30945 (USD)", RoHS="RoHS Compliant", Row Spacing="0.100\" (2.54mm)", Stock 1=596, Supplier 1=Digi-Key, Termination=Solder
J3 J7: "CONN HEADER 16POS .100 STR TIN", Supplier Part Number 1="Mouser - 649-67996-416HLF", Supplier 1=Octopart
J4: "CONN HEADER 12POS .100 STR TIN", Supplier Part Number 1="Mouser - 649-67996-412HLF", Supplier 1=Octopart
J5: "TERM BLOCK 2POS SIDE ENT 5.08MM", Color=Green, Current=24A, Manufacturer="TE Connectivity", Operating Temperature=-, Supplier Part Number 1=A98359-ND, Voltage=300V, Category="Connectors, Interconnects", Clamp Material - Plating="Brass - Nickel Plated", ComponentLink1Description=http://documents.tycoelectronics.com/commerce/DocumentDelivery/DDEController?Action=srchrtrv&DocNm=282857&DocType=CD&DocLang=EN, ComponentLink1URL=http://documents.tycoelectronics.com/commerce/DocumentDelivery/DDEController?Action=srchrtrv&DocNm=282857&DocType=CD&DocLang=EN, Contact Material - Plating="Brass - Tin Plated", Features="Interlocking (Side)", Housing Material="Polyamide (PA66), Nylon 6/6", Manufacturer Part Number=282857-2, Mating Orientation="Horizontal with Board", Mounting Type="Through Hole", Number of Levels=1, Packaging=Bulk, Pitch="0.200\" (5.08mm)", Positions Per Level=2, Pricing 1="1=1.19, 10=1.046, 25=0.984, 50=0.9432, 100=0.9021, 250=0.82012, 500=0.7381, 1000=0.65608, 2500=0.59457 (USD)", RoHS="RoHS Compliant", Screw Material - Plating="Brass - Nickel Plated", Screw Thread=M3, Stock 1=1811, Supplier 1=Digi-Key, Torque - Screw="0.79 Nm (7.0 Lb-In)", Wire Gauge="12-30 AWG", Wire Termination="Screw - Rising Cage Clamp"
J6: "CONN HEADER 20POS .100 STR TIN", Supplier Part Number 1="Mouser - 649-67996-420HLF", Supplier 1=Octopart
J10: "CONN HEADER 12POS .100 STR TIN", Color=Black, Manufacturer=FCI, Supplier Part Number 1=609-3219-ND, Category="Connectors, Interconnects", ComponentLink1Description=http://portal.fciconnect.com/Comergent//fci/drawing/67996.pdf, ComponentLink1URL=http://portal.fciconnect.com/Comergent//fci/drawing/67996.pdf, Connector Type="Header, Unshrouded", Contact Finish=Tin, Contact Finish Thickness="100µin (2.54µm)", Contact Mating Length="0.230\" (5.84mm)", Contact Type="Male Pin", Fastening Type=-, Features=-, Manufacturer Part Number=67996-412HLF, Mounting Type="Through Hole", Number of Positions=12, Number of Positions Loaded=All, Number of Rows=2, Packaging=Bulk, Pitch="0.100\" (2.54mm)", Pricing 1="1=0.4, 10=0.379, 25=0.3248, 50=0.276, 100=0.2651, 250=0.23804, 500=0.22722, 1000=0.18935, 2500=0.17312 (USD)", RoHS="RoHS Compliant", Row Spacing="0.100\" (2.54mm)", Stock 1=1044, Supplier 1=Digi-Key, Termination=Solder
Jc Js: library part 640454-3, "Headers & Wire Housings POLARIZED HEADER 3P Straight Post tin, Mouser", Supplier 1=Mouser, Supplier Part Number 1=571-6404543
Jm: Supplier Part Number 1=571-1-282857-2, Supplier 1=Mouser
L1: library part Inductor, "Inductor, SMD 10 uH 1.3 A ±30%, 744042100, Würth Elektronik, Digi-key", Case Code (Imperial)=1919, Case Code (Metric)=4848, Current Rating=1.3A, DC Resistance (DCR)=150mR, Inductance=10uH, Inductance tolerance=30%, Manufacturer="Wurth Electronics", Manufacturer Part Number=744042100, Max Operating Temperature=125°C, Min Operating Temperature=-40°C, Package Quantity=800, Saturation Current=1A, Self Resonant Frequency=45MHz, Test Frequency=100kHz, Case/Package=1919, Category="Fixed Inductors", Code_IEC=1005, Code_JEITA=0402, ComponentLink1Description=https://datasheet.ciiva.com/13320/744042100-88981-13320858.pdf?src-supplier=Mouser, ComponentLink1URL=https://datasheet.ciiva.com/13320/744042100-88981-13320858.pdf?src-supplier=Mouser, ComponentLink2Description=https://datasheet.ciiva.com/11800/0900766b8079f7c1-11800146.pdf?src-supplier=RSComponents, ComponentLink2URL=https://datasheet.ciiva.com/11800/0900766b8079f7c1-11800146.pdf?src-supplier=RSComponents, ComponentLink3Description=https://datasheet.ciiva.com/22702/744042100-22702643.pdf?src-supplier=Element14, ComponentLink3URL=https://datasheet.ciiva.com/22702/744042100-22702643.pdf?src-supplier=Element14, ComponentLink4Description=https://datasheet.ciiva.com/1050/744042100-1050948.pdf?src-supplier=Digi-Key, ComponentLink4URL=https://datasheet.ciiva.com/1050/744042100-1050948.pdf?src-supplier=Digi-Key, ComponentLink5Description=https://datasheet.ciiva.com/1050/744042100-1050950.pdf?src-supplier=Digi-Key, ComponentLink5URL=https://datasheet.ciiva.com/1050/744042100-1050950.pdf?src-supplier=Digi-Key, ComponentLink6Description=https://datasheet.ciiva.com/1050/744042100-1050949.pdf?src-supplier=Digi-Key, ComponentLink6URL=https://datasheet.ciiva.com/1050/744042100-1050949.pdf?src-supplier=Digi-Key, ComponentLink7Description=https://datasheet.ciiva.com/7754/744042100-7754411.pdf?src-supplier=Element14, ComponentLink7URL=https://datasheet.ciiva.com/7754/744042100-7754411.pdf?src-supplier=Element14, Composition=Wirewound, Core Material=Ferrite, Depth=4.8mm, Height=1.8mm, Height - Seated (Max)=0.079inch, LatestRevisionDate=29-May-2009, LatestRevisionNote="IPC-7351 Footprint Added.", Lead Free="Lead Free", Length=4.8mm, Max DC Current=1.3A, Mount="Surface Mount", Number of Pins=2, PackageDescription="Chip Inductor", PackageReference=0402-A, Packaging="Tape and Reel", Pricing 1="1=1.43000, 10=1.38900, 50=1.21500, 100=1.11100 (USD)", Published=8-Jun-2000, Publisher="Altium Limited", REACH SVHC=Unknown, RMS Current (Irms)=1.3A, RoHS=Yes, Series Resistance=150mR, Shielding=Shielded, Stock 1=16164, Supplier 1=Digi-Key, Supplier Part Number 1=732-1025-1-ND, Termination=SMD/SMT, Tolerance=30%, Weight=0.00582oz, Width=4.8mm
"Linear Reg" LRPi LRS: library part CMP-0062-02545-3, "1A Low Dropout Regulator, 3-pin TO-220, Pb-Free, Digi-key", Manufacturer="Texas Instruments", PackageTopMarking="NSUZXYTTE#*LM2940CT*-5.0 P+", PowerWise=N, ComponentLink1Description="Datasheet URL", ComponentLink1URL=http://www.ti.com/general/docs/lit/getliterature.tsp?genericPartNumber=LM2940C&fileType=pdf, CompType="LDO IC", PackageDescription="TO-220, Molded, 3 Lead, Straight", PackageReference=NDE0003A, PinCount=3, RoHS=Y, Supplier 1=Digi-Key, Supplier Part Number 1=LM2940CT-5.0/NOPB-ND
MAX: library part MAX620CPN, "MAXIM INTEGRATED PRODUCTS         MAX620CWN+             MOSFET Driver, 4.5V-16.5V supply, WSOIC-18, Digi-key", Case/Package=SOIC, Manufacturer=Maxim, Max Operating Temperature=70°C, Max Output Current=25mA, Max Power Dissipation=762mW, Max Supply Current=500uA, Max Supply Voltage=16.5V, Min Operating Temperature=0°C, Min Supply Voltage=4.5V, Package Quantity=40, Category="Gate Drivers", ComponentLink1Description=https://datasheet.ciiva.com/26879/max620cwn-26879943.pdf?src-supplier=IIIC, ComponentLink1URL=https://datasheet.ciiva.com/26879/max620cwn-26879943.pdf?src-supplier=IIIC, Fall Time=2500ns, Lead Free="Lead Free", Manufacturer Part Number=MAX620CWN+, Mount="Surface Mount", Nominal Supply Current=500uA, Number of Drivers=4, Number of Outputs=4, Number of Pins=18, Packaging=Rail/Tube, Pricing 2="1=7.24000, 10=6.54000, 25=6.23600, 100=5.17140, 250=4.71512, 500=4.67708 (USD)", Radiation Hardening=No, REACH SVHC=Unknown, Rise Time=1700ns, RoHS=Yes, Stock 2=99, Supplier 1=Digi-Key, Supplier Part Number 2=MAX620CWN+-ND
Q1 Q2: library part CMP-1164-00461-1, "N-Channel CoolMOS Power-Transistor, 500 V VDS, 23 A ID, -55 to 150 degC, PG-TO263-3-2, Reel, Green, Mouser", Manufacturer=Infineon, PartNumber=IPB50R140CP, ComponentLink1Description="Manufacturer URL", ComponentLink1URL=http://www.infineon.com/, ComponentLink2Description=Datasheet, ComponentLink2URL=http://www.infineon.com/dgdl/IPB50R140CP_rev2.0.pdf?folderId=db3a304412b407950112b408e8c90004&fileId=db3a304412b407950112b42d4eb4484f, ComponentLink3Description="Package Specification", ComponentLink3URL=http://www.infineon.com/dgdl/BTS141TC_DS_10.pdf?folderId=db3a3043163797a6011667aa084c0e01&fileId=db3a3043242ebc9e01242f43f58b003e&location=en.Products.Automotive_ICs.Smart_High-_and_Low-Side_Switches.HITFET___TEMPFET__-_Smart_Low-Side_Switches.DATASHEET.BT, DatasheetVersion="Rev. 2.0", Green=TRUE, Halogen-free=TRUE, ID (max)="23Â A", IDpuls (max)="56Â A", Mounting Technology="Surface Mount", PackageDescription="3-Pin Plastic (Green) Transistor Single Outline Package, 10 x 9.25 mm Body, 2.54 mm Pitch", PackageReference=PG-TO263-3-2, PackageVersion=Jul-09, Packing=Reel, Polarity=N, Ptot (max)="192Â W", QG="48Â nC", RDS (on) (max)="140Â mOhm", Rth="0.65Â K/W", RthJA (max)="62Â K/W", RthJC (max)="0.65Â K/W", Supplier 1=Mouser, Supplier Part Number 1=726-IPB50R140CP, Technology="CoolMOS CP", VDS (max)="500Â V", VGS(th) (max)="3.5Â V", VGS(th) (min)="2.5Â V"
R1 R2: library part Res1, "Surface Mount Thick Film Resistor, RC Series, 10 kohm, 100 mW, - 5%, 50 V, 0603 [1608 Metric], Digi-key", Case Code (Imperial)=0603, Case Code (Metric)=1608, Manufacturer=Yageo, Manufacturer Part Number=RC0603JR-0710KL, Max Operating Temperature=155°C, Max Power Dissipation=100mW, Min Operating Temperature=-55°C, Resistance=10kR, Temperature Coefficient=100ppm/°C, Tolerance=5%, Voltage Rating=50V, Case/Package=0603, Category="Chip SMD Resistors", ComponentLink1Description=https://datasheet.ciiva.com/2452/pyu-rc-group-51-rohs-l-10-2452848.pdf?src-supplier=Digi-Key, ComponentLink1URL=https://datasheet.ciiva.com/2452/pyu-rc-group-51-rohs-l-10-2452848.pdf?src-supplier=Digi-Key, Composition="Thick Film", Contact Plating=Tin,Matte, Depth=0.8mm, Features="Moisture Resistant", Height - Seated (Max)=0.022inch, LatestRevisionDate=17-Jul-2002, LatestRevisionNote="Re-released for DXP Platform.", Lead Free="Lead Free", Length=0.063inch, Military Standard=Not, Number of Pins=2, Number of Terminations=2, PackageDescription="Axial Device, Thru-Hole; 2 Leads; 0.3 in Pin Spacing", PackageReference=AXIAL-0.3, Packaging="Tape and Reel", Power Rating=100mW, Pricing 1="1=0.10000, 10=0.01900, 100=0.00770, 1000=0.00347, 2500=0.00301 (USD)", Published=8-Jun-2000, Publisher="Altium Limited", Radiation Hardening=No, REACH SVHC=Unknown, RoHS=Yes, Stock 1=2424073, Supplier 1=Digi-Key, Supplier Part Number 1=311-10KGRCT-ND, Termination=SMD/SMT, Voltage Rating (DC)=50V, Width=0.031inch
Rp1: library part Res1, "Res Thick Film 1206 53.6 Ohm 1% 0.25W(1/4W) ±100ppm/C Molded SMD Automotive Paper T/R, Digi-key", Case Code (Imperial)=1206, Case Code (Metric)=3216, Manufacturer=Vishay, Manufacturer Part Number=CRCW120653R6FKEA, Max Operating Temperature=155°C, Max Power Dissipation=250mW, Min Operating Temperature=-55°C, Package Quantity=10, Resistance=53.6R, Temperature Coefficient=100ppm/°C, Tolerance=1%, Voltage Rating=200V, Case/Package=1206, Category="Chip SMD Resistors", ComponentLink1Description=https://datasheet.ciiva.com/2497/dcrcwe3-2497248.pdf?src-supplier=Digi-Key, ComponentLink1URL=https://datasheet.ciiva.com/2497/dcrcwe3-2497248.pdf?src-supplier=Digi-Key, ComponentLink2Description=https://datasheet.ciiva.com/9000/dcrcwe3-9000149.pdf?src-supplier=Avnet, ComponentLink2URL=https://datasheet.ciiva.com/9000/dcrcwe3-9000149.pdf?src-supplier=Avnet, ComponentLink3Description=https://datasheet.ciiva.com/5543/dcrcwe3-109170-5543196.pdf?src-supplier=Mouser, ComponentLink3URL=https://datasheet.ciiva.com/5543/dcrcwe3-109170-5543196.pdf?src-supplier=Mouser, ComponentLink4Description=https://datasheet.ciiva.com/22699/1697337-22699228.pdf?src-supplier=Element14, ComponentLink4URL=https://datasheet.ciiva.com/22699/1697337-22699228.pdf?src-supplier=Element14, ComponentLink5Description=https://datasheet.ciiva.com/7732/1697337-7732205.pdf?src-supplier=Element14, ComponentLink5URL=https://datasheet.ciiva.com/7732/1697337-7732205.pdf?src-supplier=Element14, ComponentLink6Description=https://datasheet.ciiva.com/2497/dcrcwe3-2497246.pdf?src-supplier=Digi-Key, ComponentLink6URL=https://datasheet.ciiva.com/2497/dcrcwe3-2497246.pdf?src-supplier=Digi-Key, ComponentLink7Description=https://datasheet.ciiva.com/7732/1697337-7732206.pdf?src-supplier=Element14, ComponentLink7URL=https://datasheet.ciiva.com/7732/1697337-7732206.pdf?src-supplier=Element14, ComponentLink8Description=https://datasheet.ciiva.com/2497/dcrcwe3-2497247.pdf?src-supplier=Digi-Key, ComponentLink8URL=https://datasheet.ciiva.com/2497/dcrcwe3-2497247.pdf?src-supplier=Digi-Key, Composition="Thick Film", Contact Plating=Tin, Depth=1.6mm, Features="Automotive AEC-Q200", Height=0.024inch, LatestRevisionDate=17-Jul-2002, LatestRevisionNote="Re-released for DXP Platform.", Lead Free="Lead Free", Length=3.2mm, Military Standard=Not, Number of Pins=2, Number of Terminations=2, PackageDescription="Axial Device, Thru-Hole; 2 Leads; 0.3 in Pin Spacing", PackageReference=AXIAL-0.3, Packaging="Tape and Reel", Power Rating=250mW, Pricing 1="1=0.10000, 10=0.07600, 100=0.02930, 1000=0.01287, 2500=0.01112 (USD)", Published=8-Jun-2000, Publisher="Altium Limited", Radiation Hardening=No, REACH SVHC=Unknown, RoHS=Yes, Stock 1=787, Supplier 1=Digi-Key, Supplier Part Number 1=541-53.6FCT-ND, Termination=SMD/SMT, Voltage Rating (DC)=200V, Weight=0.000353oz, Width=0.063inch
Rp2: library part Res1, "Thick Film Resistors 6.19K 1%,Digi-key", Case Code (Imperial)=1206, Case Code (Metric)=3216, Manufacturer=Bourns, Manufacturer Part Number=CR1206-FX-6191ELF, Max Operating Temperature=155°C, Max Power Dissipation=250mW, Min Operating Temperature=-55°C, Package Quantity=5000, Resistance=6.19kR, Temperature Coefficient=100ppm/°C, Tolerance=1%, Voltage Rating=200V, Case/Package=1206, Category="Chip SMD Resistors", ComponentLink1Description=https://datasheet.ciiva.com/5542/chpreztr-5542280.pdf?src-supplier=Mouser, ComponentLink1URL=https://datasheet.ciiva.com/5542/chpreztr-5542280.pdf?src-supplier=Mouser, ComponentLink2Description=https://datasheet.ciiva.com/9122/chpreztr-9122638.pdf?src-supplier=Avnet, ComponentLink2URL=https://datasheet.ciiva.com/9122/chpreztr-9122638.pdf?src-supplier=Avnet, Composition="Thick Film", Contact Plating=Tin, Depth=1.6mm, Height=0.03inch, LatestRevisionDate=17-Jul-2002, LatestRevisionNote="Re-released for DXP Platform.", Length=3.2mm, Military Standard=Not, Mount="Surface Mount", Number of Terminations=2, PackageDescription="Axial Device, Thru-Hole; 2 Leads; 0.3 in Pin Spacing", PackageReference=AXIAL-0.3, Packaging="Tape and Reel", Power Rating=250mW, Pricing 1="1=0.11000, 10=0.09400, 100=0.03630, 1000=0.01597, 2500=0.01380 (USD)", Published=8-Jun-2000, Publisher="Altium Limited", Radiation Hardening=No, RoHS=Yes, Stock 1=19832, Supplier 1=Digi-Key, Supplier Part Number 1=CR1206-FX-6191ELFCT-ND, Termination=SMD/SMT, Thickness=610um, Width=1.6mm
Rp3: library part Res1, "BOURNS - CR1206-FX-2001ELF - RES, 2K, 1%, 0.25W, 1206, THICK FILM, Digi-key", Case Code (Imperial)=1206, Case Code (Metric)=3216, Manufacturer=Bourns, Manufacturer Part Number=CR1206-FX-2001ELF, Max Operating Temperature=155°C, Max Power Dissipation=250mW, Min Operating Temperature=-55°C, Package Quantity=1, Resistance=2kR, Temperature Coefficient=100ppm/°C, Tolerance=1%, Voltage Rating=200V, Case/Package=1206, Category="Chip SMD Resistors", ComponentLink1Description=https://datasheet.ciiva.com/9123/chpreztr-9123286.pdf?src-supplier=Avnet, ComponentLink1URL=https://datasheet.ciiva.com/9123/chpreztr-9123286.pdf?src-supplier=Avnet, ComponentLink2Description=https://datasheet.ciiva.com/6547/chpreztr-6547512.pdf?src-supplier=Digi-Key, ComponentLink2URL=https://datasheet.ciiva.com/6547/chpreztr-6547512.pdf?src-supplier=Digi-Key, ComponentLink3Description=https://datasheet.ciiva.com/6547/chpreztr-6547518.pdf?src-supplier=Digi-Key, ComponentLink3URL=https://datasheet.ciiva.com/6547/chpreztr-6547518.pdf?src-supplier=Digi-Key, ComponentLink4Description=https://datasheet.ciiva.com/46383/691949-46383774.pdf?src-supplier=Element14, ComponentLink4URL=https://datasheet.ciiva.com/46383/691949-46383774.pdf?src-supplier=Element14, ComponentLink5Description=https://datasheet.ciiva.com/22713/691949-22713279.pdf?src-supplier=Element14, ComponentLink5URL=https://datasheet.ciiva.com/22713/691949-22713279.pdf?src-supplier=Element14, ComponentLink6Description=https://datasheet.ciiva.com/5543/chpreztr-5543718.pdf?src-supplier=Mouser, ComponentLink6URL=https://datasheet.ciiva.com/5543/chpreztr-5543718.pdf?src-supplier=Mouser, ComponentLink7Description=https://datasheet.ciiva.com/16927/chpreztr-16927448.pdf?src-supplier=Avnet+Europe, ComponentLink7URL=https://datasheet.ciiva.com/16927/chpreztr-16927448.pdf?src-supplier=Avnet+Europe, ComponentLink8Description=https://datasheet.ciiva.com/6547/chpreztr-6547515.pdf?src-supplier=Digi-Key, ComponentLink8URL=https://datasheet.ciiva.com/6547/chpreztr-6547515.pdf?src-supplier=Digi-Key, ComponentLink9Description=https://datasheet.ciiva.com/48692/001055531-da-01-en-smd-wid-cr1206-fx-2001elf-2k-ohm-1-4w-48692026.pdf?src-supplier=Conrad, ComponentLink9URL=https://datasheet.ciiva.com/48692/001055531-da-01-en-smd-wid-cr1206-fx-2001elf-2k-ohm-1-4w-48692026.pdf?src-supplier=Conrad, Composition="Thick Film", Contact Plating=Tin, Depth=1.6mm, Features="Moisture Resistant", Height=0.03inch, LatestRevisionDate=17-Jul-2002, LatestRevisionNote="Re-released for DXP Platform.", Length=3.2mm, Military Standard=Not, Mount="Surface Mount", Number of Pins=2, Number of Terminations=2, PackageDescription="Axial Device, Thru-Hole; 2 Leads; 0.3 in Pin Spacing", PackageReference=AXIAL-0.3, Packaging="Tape and Reel", Power Rating=250mW, Pricing 1="1=0.10000, 10=0.03800, 100=0.01560, 1000=0.00700, 2500=0.00607 (USD)", Published=8-Jun-2000, Publisher="Altium Limited", Radiation Hardening=No, REACH SVHC="No SVHC", RoHS=Yes, Stock 1=36084, Supplier 1=Digi-Key, Supplier Part Number 1=CR1206-FX-2001ELFCT-ND, Termination=SMD/SMT, Thickness=610um, Voltage Rating (DC)=200V, Width=1.6mm
Rpd1 Rpd2: library part Res1, "RES SMD 10K OHM 1% 1/4W 1206, Mouser", Case/Package=1206, Manufacturer=Yageo, Manufacturer Part Number=RT1206FRD0710KL, Max Operating Temperature=155°C, Max Power Dissipation=250mW, Min Operating Temperature=-55°C, Resistance=10kR, Temperature Coefficient=25ppm/°C, Tolerance=1%, Category="Chip SMD Resistors", ComponentLink1Description=http://www.yageo.com/documents/recent/PYu-RT_1-to-0.01_RoHS_L_8.pdf?src-supplier=Digi-Key, ComponentLink1URL=http://www.yageo.com/documents/recent/PYu-RT_1-to-0.01_RoHS_L_8.pdf?src-supplier=Digi-Key, Composition="Thin Film", Features="Moisture Resistant", Height=0.026inch, LatestRevisionDate=17-Jul-2002, LatestRevisionNote="Re-released for DXP Platform.", Length=0.122inch, Number of Terminations=2, PackageDescription="Axial Device, Thru-Hole; 2 Leads; 0.3 in Pin Spacing", PackageReference=AXIAL-0.3, Packaging="Tape and Reel", Pricing 1="1=0.15000, 10=0.09100, 100=0.03000, 1000=0.02100, 5000=0.01600, 10000=0.01500 (USD)", Published=8-Jun-2000, Publisher="Altium Limited", RoHS=Yes, Stock 1=8660, Supplier 1=Mouser, Supplier Part Number 1=603-RT1206FRD0710KL, Width=0.063inch
S1: "Switch", LatestRevisionDate=17-Jul-2002, LatestRevisionNote="Re-released for DXP Platform.", PackageDescription="Switch; 2 Leads", PackageReference=SPST-2, Published=24-Mar-1999, Publisher="Altium Limited"
SWR1: library part CMP-0491-01356-1, "500 kHz High Efficiency 6 A Switching Regulator, 7-pin DPAK (R-7), 0 to 125 degC, Digi-key", Frequency Sync Range="600kHz - 800kHz", Manufacturer="Linear Technology", PartNumber=LT1370CR, ComponentLink1Description="Manufacturer URL", ComponentLink1URL=http://www.linear.com/, ComponentLink2Description=Datasheet, ComponentLink2URL=http://cds.linear.com/docs/en/datasheet/1370fs.pdf, ComponentLink3Description="Package Specification", ComponentLink3URL=http://cds.linear.com/docs/en/packaging/05081462_F_R.pdf, Mounting Technology="Surface Mount", Number of Outputs=1, PackageDescription="7-Pin Plastic DD Pak, Body 10.2235 x 8.89 mm, Pitch 1.27 mm", PackageReference=R-7, PackageVersion="Rev. F, 05/2012", RoHS=FALSE, Supplier 1=Digi-Key, Supplier Part Number 1=LT1370CR#TRPBFCT-ND

## Via types
v1: diameter 50, hole 28, Top Layer to Bottom Layer, 12 vias

## Nets (pads, with @x,y where several pads share a name; then routed paths per layer and width w, separated by ;. In a path a pad name is that pad's centre, name@x,y a point inside that pad or via, vN(x,y) a via of type N, cw(c..) or ccw(c..) an arc to the next point about the centre after c; other vN are vias at no path point)
+3.3V: J9.4 J9.8 | length 236.9
  Top Layer w12: J9.4 -1955.5,-2044.5 -1844.5,-2044.5 J9.8
Cap6: C5.1 MAX.13 | length 796.4
  Top Layer w10: C5.1@-1180.15,-1790 -1183.15,-1793 -1229.37,-1793 -1252,-1770.37 -1273.54,-1770.37 -1273.64,-1770.46 -1432.36,-1770.46 -1438.8,-1764.02 -1438.8,-1660.98 -1369.62,-1591.79 -1334.42,-1591.79 -1257.25,-1514.62 -1221.01,-1514.62 -1139.39,-1433 MAX.13
Cap7: C4.2 MAX.10 | length 266.4
  Top Layer w10: C4.2@-1300.2,-1726.2 -1300.2,-1714.77 -1283.2,-1697.76 -1271.76,-1697.76 -1219,-1645 -1173.83,-1645 -1138.65,-1609.81 -1138.65,-1589.29 -1132.35,-1583 MAX.10
GND: "Linear Reg.2" C2.1 Cb1.1 Cpd.1 Cr1.1 Cr2.1 Cr3.2 Cv2.2 D2.1 J2.14 J5.2 J7.13 J9.12 J9.14 Jc.3 Js.3 LRPi.2 LRS.2 MAX.3 MAX.4 MAX.5 MAX.7 Q2.3 R1.1 R2.1 Rp2.1 Rp3.1 Rpd1.2 Rpd2.1 SWR1.4 SWR1.6 SWR1.8 | length 1509.6
  Top Layer w10: J2.14@-2159.02,-109.02 J2.14 ; SWR1.8 -1968.47,-546.98 -1780.54,-734.91 -1780.54,-743.75 -1763.93,-760.36 -1609.11,-760.36 -1577,-792.48 -1577,-837.52 -1598.94,-859.46 -1694.91,-859.46 -1761.37,-793 -1920.56,-793 -1977.7,-850.14 -1977.7,-855.43 -1998,-875.72 -1998,-954.46 -1977.7,-974.76 -1977.7,-977.72 -1971.26,-984.17 -1924.74,-984.17 -1918.3,-977.72 -1918.3,-974.76 -1898,-954.46 SWR1.6
  Top Layer w30: Cr2.1 Cr2.1@-1456.19,-521.15
  Bottom Layer w30: J5.2@-2970,-1599 -2970,-1512 -2946.35,-1512 -2923.96,-1534.39 J5.2@-2922.82,-1534.39 ; LRPi.2@-2295,-2124.19 LRPi.2 ; J2.14@-2152.6,-100 J2.14 ; J9.14 -1493.3,-2006.7 J9.14@-1483.64,-2006.7 ; J7.13 J7.13@-1496.4,-2267
  other v1: -2105,-1813 -1929,-1625 -720,-1563 -2622,-1530 -1367,-1406 -582,-960 -2448,-795 -2638,-660 -1472,-615 -2290,-607 -2665,-174 -227,-174
NetC1_1: C1.1 C2.2 D1.1 D2.2 Jm.1 Q1.3 Q2.2 | length 3294.8
  Top Layer w10: D1.1 D1.1@-1290.42,-991.24 ; C2.2@-591.28,-1838.72 -583.8,-1846.2 -589.03,-1851.44 C2.2
  Top Layer w80: D2.2 -982.65,-729.19 -806.46,-553 Q2.2
  Top Layer w81: D1.1 -1292.28,-1010.81 -1285.54,-1004.07 -1285.54,-958.54 -1130.46,-803.46 -1130.46,-735.93 -1123.72,-729.19 D2.2
  Top Layer w120: -142,-1641 -117.5,-1665.5
  Top Layer w140: Q2.2 -198,-553 -142,-609 -142,-1641 ; Q1.3 -586.79,-1733.73 ; -581,-1739.52 -581,-1810 -496,-1810 -478.62,-1827.38 -443.88,-1827.38 ; -496,-1776 -389,-1776 ; -389,-1895 -389,-1866 Jm.1 ; Jm.1@-309,-1776 -228,-1776 -117.5,-1665.5
NetCr1_2: "Linear Reg.1" Cr1.2 Cr2.2 Cr3.1 Dsw.4 Rp1.2 | length 2236.2
  Top Layer w10: Dsw.4@-2166.5,-1340.5 Dsw.4 Dsw.4@-2079.68,-1253.68 ; Cr3.1@-1671.26,-474.1 -1671.26,-471.15 -1632.95,-432.84 Cr3.1 ; Rp1.2@-1532,-828.15 Rp1.2 Rp1.2@-1518.85,-809.09 ; Cr2.2@-1497.8,-432.84 -1479.81,-414.85 Cr2.2
  Top Layer w31: -2413,-1446 -2264.13,-1446 -2166.5,-1348.37 Dsw.4@-2166.5,-1340.5 ; Dsw.4@-2079.68,-1253.68 -1986.68,-1253.68 -1930,-1197 -1596,-1197 -1532,-1133 Rp1.2@-1532,-828.15 ; Cr3.1@-1671.26,-474.1 -1738,-540.84 -1738,-708 -1712.14,-733.86 -1588.18,-733.86 -1518.85,-803.19 Rp1.2@-1518.85,-809.09 ; Cr3.1 Cr2.2@-1497.8,-432.84 ; Cr2.2 Cr1.2@-1332,-414.85
NetCv1_1: Cv1.1 Cv2.1 SWR1.1 | length 825.3
  Top Layer w10: Cv2.1 -2467,-566.5 -2445.28,-544.78 -2444.25,-544.78 -2408.8,-509.33 -2408.8,-418.65 Cv1.1 ; -2412,-512.52 -2412,-669 -2393.47,-687.54 -2333.94,-687.54 -2327.5,-693.98 -2327.5,-774.28 -2239.76,-862.02 -2161.7,-862.02 -2148,-875.72 SWR1.1
NetCv1_2: Cv1.2 Rp3.2 | length 777.6
  Top Layer w10: Rp3.2 -2530.85,-470.03 -2418.36,-357.54 -2365.94,-357.54 -2344.22,-379.25 -2344.22,-380.28 -2322.5,-402 Cv1.2
NetDsw_1: Dsw.1 Dsw.3 L1.2 SWR1.5 | length 2255.4
  Top Layer w10: Dsw.1 Dsw.1@-2250.16,-1589.91 ; SWR1.5 SWR1.5@-1948,-875.72
  Top Layer w31: Dsw.1 Dsw.3 ; Dsw.1@-2250.16,-1589.91 -2291.06,-1549 -2466.14,-1549 -2514,-1501.14 -2514,-1272.05 -2378.95,-1137 -1670.79,-1137 -1652.63,-1118.84 -1652.63,-1095.12 L1.2 -1644.5,-1011.41 -1820.39,-835.52 -1925.61,-835.52 -1944.8,-854.72 -1944.8,-875.72 -1944.8,-911.89 SWR1.5
NetJ5_1: J5.1 S1.1 | length 797.9
  Bottom Layer w80: J5.1 -2963,-1193 -2775,-1005 S1.1
NetLabel12: C3.1 MAX.8 | length 347.7
  Top Layer w10: C3.1 -1724.15,-1721.19 -1707.5,-1704.54 -1665.26,-1704.54 -1493.72,-1533 MAX.8
Netlabel13: C1.2 C3.2 Cb1.2 Cpd.2 D1.2 Jm.2 L1.1 LRPi.1 LRS.1 MAX.12 Q1.2 S1.2 SWR1.3 SWR1.7 | length 15316.8
  Top Layer w10: SWR1.3@-2061.7,-958.17 SWR1.3@-2061.7,-928.8 ; SWR1.3@-2048,-954.46 -2027.7,-974.76 -2027.7,-893.07 SWR1.3@-2046.52,-874.25 ; C3.2@-1617.85,-1744.81 -1601.2,-1761.46 C3.2@-1600.9,-1761.46 ; -1129,-1835 -1128.46,-1834.46
  Top Layer w30: -2051.7,-998.06 -2051.7,-958.17 SWR1.3@-2048,-954.46
  Top Layer w31: -2726.46,-1737 -2356.44,-1737 -2352.44,-1741 -1819.98,-1741 -1773.01,-1787.96 -1661,-1787.96 -1617.85,-1744.81 C3.2 ; LRS.1 LRS.1@-2560,-2109 ; -2023,-1025 -1874,-1025 -1848,-999 -1848,-954.46 -1768.61,-1033.85 -1729.99,-1033.85 -1715.62,-1048.22 -1715.62,-1078.88 L1.1 ; C3.2@-1600.9,-1761.46 -1526.36,-1836 -1327.5,-1836 ; -1129,-1839 -1072.33,-1839 -1039.7,-1806.37 -1039.7,-1520.3 -1060.31,-1499.69 -1074.96,-1499.69 MAX.12@-1087.96,-1486.69 ; -1128.65,-1836 -1327.5,-1836 ; C1.2 -414,-2195 -554,-2335 -1287.84,-2335 -1306,-2316.84 -1306,-1857.5 -1327.5,-1836
  Top Layer w60: -2065,-1067 -2050,-1052 -2050,-999.76 -2051.7,-998.06
  Top Layer w80: Cb1.2 -2765.7,-1081.15 ; LRS.1 -2643,-2093 -2726.46,-2009.54 -2726.46,-1737 -2726.46,-1265.44 -2660.87,-1199.85 Cpd.2 -2765.7,-1081.15 ; LRS.1@-2560,-2109 -2414,-2255 -2329,-2255 LRPi.1 ; -2065,-1067 -2079,-1053 -2737.55,-1053 -2765.7,-1081.15 ; Q1.2 -778,-1283 -778,-999.27 -778.68,-998.6 -778.68,-879.51 -835.25,-822.94 -910.75,-822.94 -928.81,-841 -934,-841 -985.34,-892.34 -985.34,-1080.84 -1008.56,-1104.06 -1394.01,-1104.06 -1420.96,-1077.11 -1420.96,-830.43 -1327.72,-737.19 D1.2 -1292.28,-737.19 -1182,-626.91 -1182,-368 -1249,-301 -2556.79,-301 -2588.79,-333 S1.2 -2909,-467 -2909,-860 -2765.7,-1003.3 -2765.7,-1081.15
  Top Layer w140: Q1.2 -685.54,-1342 -590.18,-1437.35 -590.18,-1470.82 -464,-1597 -320,-1597 Jm.2
  Bottom Layer w140: S1.2 -1562,-333 Jm.2